# EAGLE board PowerBricksBoard (EAGLE 9.5.0)

Size 160 x 100 mm. Coordinates in mm from the lower left corner, seen from the top.
Outline: 0,0 160,0 160,100 0,100 0,0
Copper layers (1*16): Top 0.035mm / dielectric 1.5mm / Bottom 0.035mm
Design rules "default": minimum track width 6mil, minimum drill 0.35mm, track to track 6mil, track to pad 6mil, pad to pad 6mil, via to via 6mil, smd to smd 6mil, copper to edge 40mil, drill to drill 6mil, minimum pad ring 10mil, minimum via ring 8mil, stop-mask expansion 4mil, vias tented up to drill 0mil, thermal gap 10mil

## Footprints (pad centres in the part's own frame; a part is rotated, then mirrored left to right if it is on the bottom)
Q48SC12050NRDH = drill 1.6: P$1 0,0; P$2 0,3.81; P$3 0,7.62; P$4 0,15.24; P$6 50.8,7.62; P$7 50.8,3.81; P$8 50.8,11.43 | drill 2.1: P$5 50.8,0; P$9 50.8,15.24 | drill 1.2: P$10 53.34,7.62; P$11 53.34,5.62; P$12 53.34,3.62; P$13 53.34,9.62; P$14 53.34,11.62; P$15 53.34,13.62; P$16 53.34,1.62
UCM1H331MNL1GS = smd 3 x 5: P$1 0,-4.5; P$2 0,4.5

## Placement (x,y rotation side)
U$1  Q48SC12050NRDH  [Q48SC12050NRDH]  -68.58,11.43 0 top  (outside the outline)
U$2  UCM1H331MNL1GS  [UCM1H331MNL1GS]  -17.78,45.72 0 top  (outside the outline)
U$3  UCM1H331MNL1GS  [UCM1H331MNL1GS]  -27.94,45.72 0 top  (outside the outline)
U$4  UCM1H331MNL1GS  [UCM1H331MNL1GS]  -38.1,45.72 0 top  (outside the outline)

## Library data of the parts
U$1 = Q48SC12050NRDH
U$2-U$4 = UCM1H331MNL1GS

## Nets
48_GND: U$1.P$1 U$2.P$2 U$3.P$2 U$4.P$2
48V: U$1.P$4 U$2.P$1 U$3.P$1 U$4.P$1

## Tracks (layer width: path | path; a pad name or v marks a point on that pad's centre or on a via)
48_GND  (3 unrouted)
48V  (3 unrouted)